# Altium PCB 100885.pcbdoc (part 2 of 3)
Units mm, origin at the board's own origin, x right, y up, seen from the top; angles counter-clockwise.
Board outline 292.21 x 226.73 mm, 2 copper layers (Top Layer, Bottom Layer), stack 0.091 mm thick; 33 components, 69 nets, 230 pads, 87 vias.
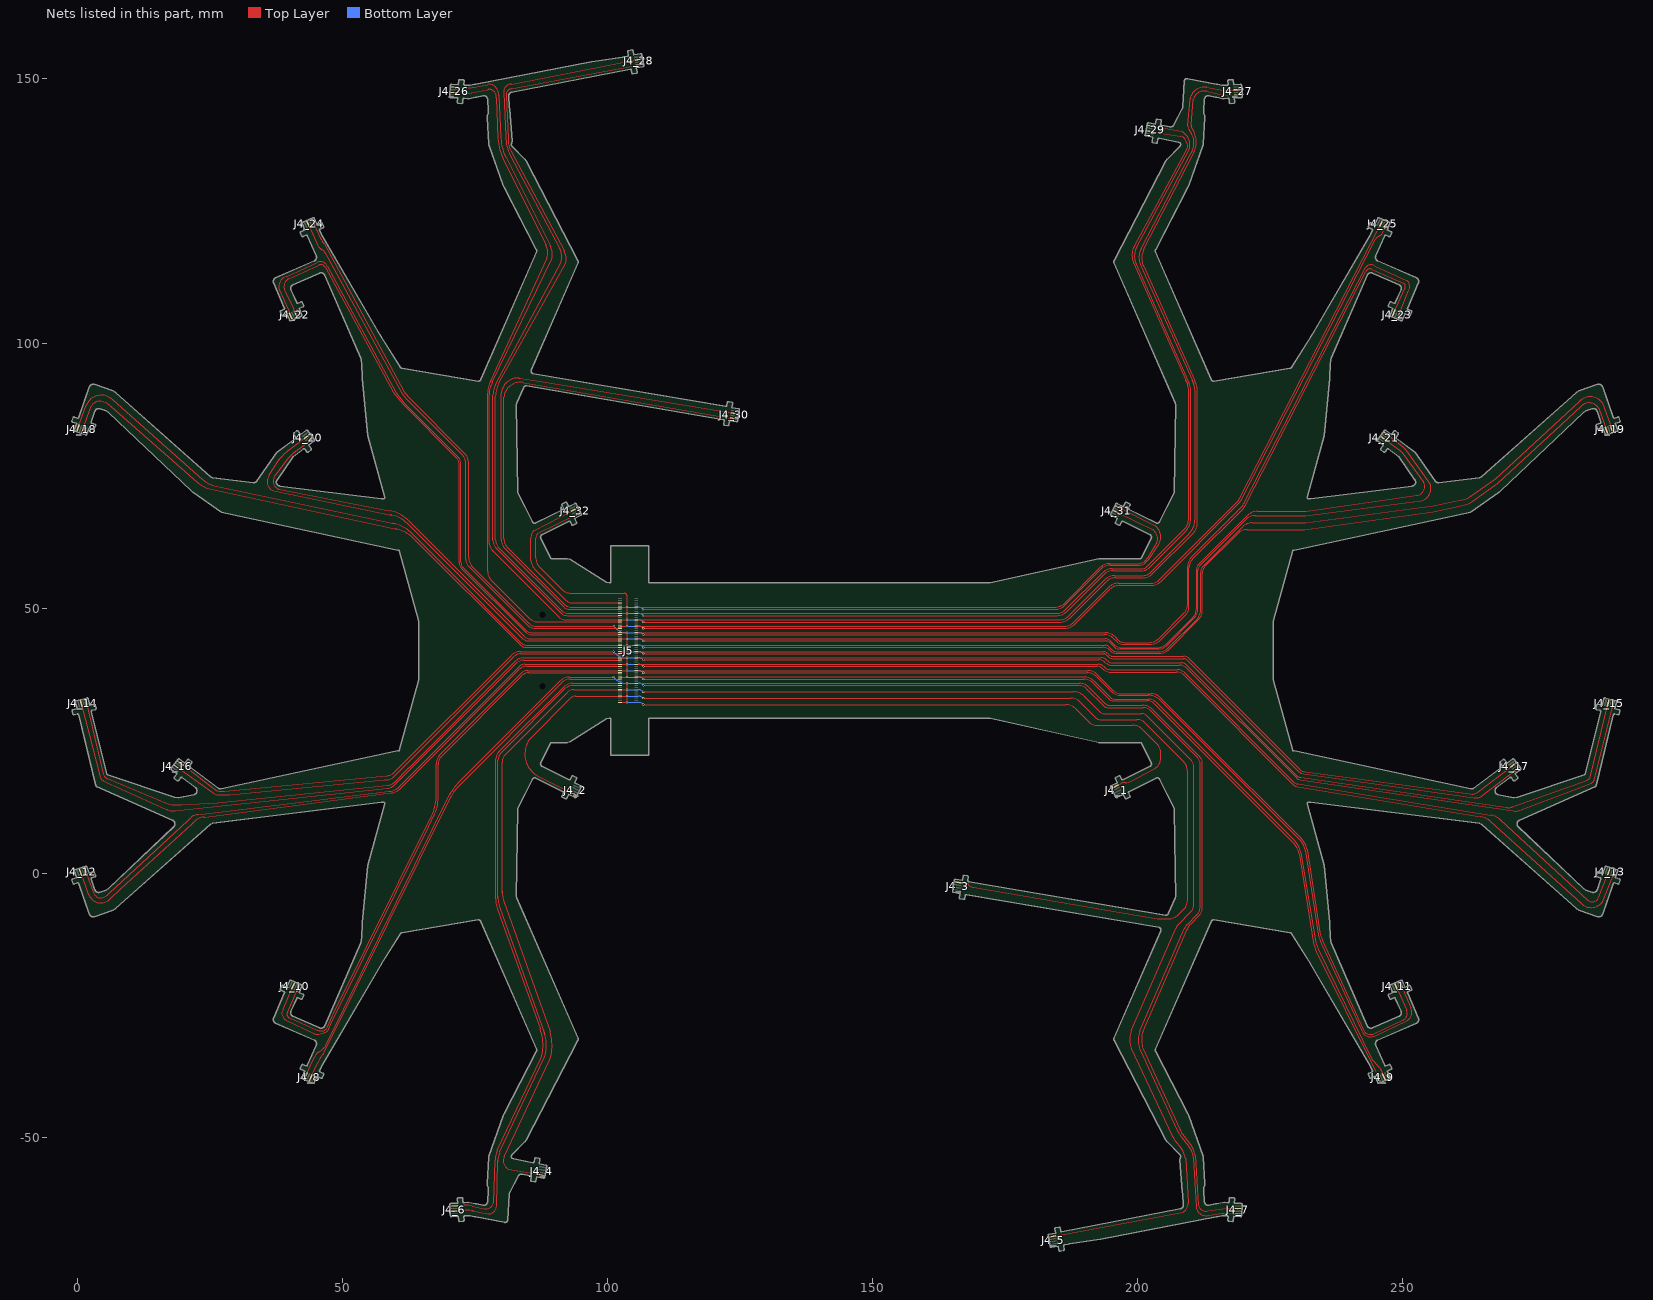
[diagram p2: the nets of this part, all layers, seen from the top]

## Via types
v1: diameter 0.4, hole 0.23, Top Layer to Bottom Layer, tented both sides, 87 vias

## Nets (pads, with @x,y where several pads share a name; then routed paths per layer and width w, separated by ;. In a path a pad name is that pad's centre, name@x,y a point inside that pad or via, vN(x,y) a via of type N, cw(c..) or ccw(c..) an arc to the next point about the centre after c; other vN are vias at no path point) (continued)
SENSOR_E6: J4_6.2 J5.18 | length 127.8
  Top Layer w0.125: J4_6.2@71.054,-63.812 73.14,-63.656 cw(c73.366,-69.703) 74.335,-63.729 ; 74.591,-63.776 ccw(c73.366,-69.703) 74.335,-63.729 ; 79.032,-62.853 cw(c77.462,-62.77) 77.347,-64.338 74.335,-63.729 ; 79.037,-62.853 79.224,-54.424 ; 79.224,-54.474 cw(c83.492,-54.441) 79.224,-54.424 ; 79.29,-4.409 ccw(c85.151,-4.556) 79.29,-4.703 ; 79.637,-52.609 ccw(c83.492,-54.441) 79.633,-52.617 ; 79.643,-6.57 88.159,-30.431 ; 79.645,-6.57 cw(c85.151,-4.556) 79.29,-4.703 ; 87.815,-29.451 cw(c80.789,-32.469) 88.159,-30.431 ; 87.972,-35.091 ccw(c80.789,-32.469) 88.058,-34.842 ; J5.18@102.329,35.411 93.34,35.411 ccw(c93.34,33.519) 92.002,34.856 79.863,22.717 ccw(c81.246,21.334) 79.29,21.334 79.29,-4.703 ; 79.224,-54.424 cw(c83.492,-54.441) 79.227,-54.269 ; 79.224,-54.424 79.227,-54.269 ; 79.228,-54.269 cw(c83.492,-54.441) 79.633,-52.617 ; 79.633,-52.617 88.058,-34.842 ; 88.058,-34.842 ccw(c80.789,-32.469) 88.419,-32.976 ccw(c80.789,-32.469) 88.419,-31.962 ccw(c80.789,-32.469) 88.159,-30.431
SENSOR_E7: J4_7.2 J5.19 | length 210
  Top Layer w0.125: J5.19@105.409,35.813 189.015,35.813 cw(c189.015,33.273) 190.811,35.069 193.84,32.041 ccw(c194.745,32.946) 194.745,31.666 201.015,31.666 cw(c201.015,29.223) 202.742,30.95 211.727,21.966 cw(c210.481,20.72) 212.243,20.72 212.243,-6.624 cw(c210.38,-6.624) 211.697,-7.941 210.115,-9.523 ccw(c213.058,-12.344) 209.363,-10.623 ; 201.071,-33.255 cw(c205.892,-31.487) 201.056,-33.214 ; 207.951,-48.335 201.056,-33.214 ; 207.953,-48.334 ccw(c214.362,-45.386) 208.711,-49.609 210.047,-51.296 ; 209.345,-10.661 cw(c213.058,-12.344) 209.363,-10.623 ; 210.015,-51.256 cw(c206.629,-53.862) 210.857,-53.242 ; 210.863,-53.288 ccw(c206.629,-53.862) 210.857,-53.242 ; 213.213,-63.771 cw(c212.896,-62.351) 211.485,-62.71 210.857,-53.242 ; 213.217,-63.772 216.819,-63.244 217.175,-63.235 J4_7.2@218.937,-63.332 ; 201.056,-33.214 cw(c205.892,-31.487) 201.04,-29.806 209.363,-10.623
SENSOR_E8: J4_8.2 J5.24 | length 100.9
  Top Layer w0.125: J4_8.2@43.955,-38.655 45.312,-35.771 cw(c50.967,-37.889) 46.05,-34.384 46.279,-34.201 ; 46.271,-34.207 ccw(c45.947,-33.785) 46.424,-34.022 46.54,-33.788 70.428,14.459 ; 70.297,14.207 cw(c77.857,10.444) 70.428,14.459 ; J5.24@102.329,36.611 92.9,36.611 ccw(c92.9,34.582) 91.465,36.016 71.69,16.242 ccw(c76.554,11.459) 70.428,14.459
SENSOR_E9: J4_9.2 J5.25 | length 185.2
  Top Layer w0.125: J5.25@105.409,37.013 189.971,37.013 cw(c189.971,34.473) 191.767,36.269 194.745,33.291 ccw(c195.846,34.391) 195.846,32.835 201.99,32.835 cw(c201.99,30.709) 203.494,32.212 229.74,5.966 ; 229.665,6.041 cw(c226.757,3.058) 229.74,5.966 ; 230.839,3.891 ccw(c226.757,3.058) 229.74,5.966 ; 230.843,3.891 233.527,-12.584 ccw(c240.802,-11.245) 234.077,-14.326 ; 234.076,-14.327 244.212,-35.148 245.54,-36.584 cw(c244.562,-37.791) 246.043,-37.325 246.51,-38.433 J4_9.2@246.511,-38.435
SENSOR_E10: J4_10.2 J5.30 | length 114.4
  Top Layer w0.125: 39.317,-27.748 cw(c39.983,-26.434) 38.715,-25.684 J4_10.2@40.673,-21.274 ; 39.349,-27.758 44.49,-30.22 ; 45.433,-30.41 46.44,-30.115 ; 45.433,-30.413 cw(c45.233,-28.989) 44.74,-30.34 ; 47.349,-29.433 cw(c46.269,-28.92) 46.569,-30.078 ; 47.351,-29.434 47.868,-28.347 66.219,8.718 67.399,11.16 ; 67.168,10.672 ccw(c60.534,14.105) 67.399,11.16 ; 67.99,14.566 cw(c60.534,14.105) 67.999,14.38 ; J5.30@102.329,37.811 85.053,37.811 ccw(c85.053,36.201) 83.915,37.339 68.656,22.08 ccw(c70.243,20.494) 67.999,20.494 67.999,14.38 ; 44.49,-30.22 ccw(c45.233,-28.989) 44.74,-30.34 ; 44.49,-30.22 44.74,-30.34 ; 46.44,-30.115 ccw(c46.101,-28.717) 46.569,-30.078 ; 46.44,-30.115 46.569,-30.078 ; 67.399,11.16 ccw(c60.534,14.105) 67.999,13.83 ; 67.999,13.83 ccw(c60.534,14.105) 67.999,14.38 ; 67.999,13.83 67.999,14.38
SENSOR_E11: J4_11.2 J5.31 | length 192.4
  Top Layer w0.125: J5.31@105.409,38.213 190.596,38.213 cw(c190.596,35.673) 192.392,37.469 195.277,34.585 ccw(c197.073,36.381) 197.073,33.841 202.64,33.841 cw(c202.64,31.577) 204.241,33.178 205.17,32.249 211.984,25.434 230.865,6.554 ; 232.039,4.404 ccw(c227.957,3.57) 230.94,6.479 ; 232.041,4.404 234.425,-11.134 ccw(c241.7,-9.795) 234.89,-12.683 ; 234.975,-12.876 cw(c241.7,-9.795) 234.89,-12.683 ; 244.552,-30.307 250.188,-27.688 ; 244.576,-30.314 cw(c243.953,-29.019) 242.634,-29.59 234.89,-12.683 ; J4_11.2@248.833,-21.476 250.788,-25.885 ; 250.228,-27.667 ccw(c249.637,-26.501) 250.789,-25.884 ; 230.865,6.554 cw(c227.957,3.57) 230.94,6.479 ; 230.865,6.554 230.94,6.479
SENSOR_E12: J4_12.2 J5.36 | length 121.8
  Top Layer w0.125: J4_12.2@0.477,0.169 1.184,-1.796 1.899,-3.759 ; 1.962,-3.932 1.904,-3.774 ccw(c4.784,-2.716) 3.751,-5.604 4.326,-5.604 ccw(c4.326,-3.064) 6.123,-4.861 8.074,-2.909 21.58,9.341 22.055,9.815 cw(c23.851,8.019) 22.483,10.16 cw(c23.851,8.019) 23.119,10.452 cw(c23.851,8.019) 23.851,10.559 23.94,10.559 59.09,15.176 ccw(c59.09,17.505) 59.691,15.255 ccw(c59.09,17.505) 60.736,15.858 ; 60.737,15.858 83.32,38.441 cw(c84.695,37.065) 84.695,39.011 J5.36@102.329,39.011 ; 1.899,-3.759 ccw(c4.784,-2.716) 1.904,-3.773 1.899,-3.759
SENSOR_E13: J4_13.2 J5.37 | length 203.1
  Top Layer w0.125: J5.37@105.359,39.419 192.562,39.419 cw(c192.562,37.788) 193.715,38.941 ccw(c195.043,40.269) 195.043,38.391 207.536,38.391 cw(c207.536,36.596) 208.805,37.866 ; 208.805,37.865 229.491,17.179 ; 229.491,17.179 ccw(c230.311,17.999) 229.944,16.899 230.311,16.84 266.696,10.932 cw(c266.248,7.789) 268.446,10.079 284.947,-5.152 ccw(c285.785,-3.942) 287.101,-4.602 ; 287.099,-4.603 J4_13.2@288.991,0.279
SENSOR_E14: J4_14.2 J5.42 | length 124.3
  Top Layer w0.125: J4_14.2@0.651,31.991 4.215,18.116 ccw(c5.728,18.768) 4.693,17.486 ccw(c5.728,18.768) 5.138,17.23 16.89,11.966 ; 16.765,12.016 ccw(c18.161,15.333) 16.89,11.966 ; 18.356,11.739 cw(c18.161,15.333) 18.243,11.735 ; J5.42@102.329,40.211 84.163,40.211 ccw(c84.163,38.351) 82.847,39.666 62.672,19.491 62.659,19.491 59.812,16.644 cw(c58.369,18.088) 58.369,16.047 18.243,11.735 ; 16.89,11.966 ccw(c18.161,15.333) 18.243,11.735
SENSOR_E15: J4_15.2 J5.43 | length 205.5
  Top Layer w0.125: J5.43@105.384,40.619 105.402,40.636 193.115,40.636 cw(c193.115,39.116) 194.19,40.191 ccw(c195.397,41.398) 195.397,39.691 208.289,39.691 cw(c208.289,38.414) 209.192,39.317 ; 209.192,39.317 230.193,18.316 ccw(c230.77,18.894) 230.537,18.111 230.77,18.077 269.64,12.402 ; 270.816,12.528 cw(c270.016,14.447) 270.761,12.506 ; J4_15.2@288.839,32.108 285.427,18.073 cw(c284.47,18.489) 284.89,17.534 270.761,12.506 ; 269.64,12.402 ccw(c270.016,14.447) 269.791,12.38 ; 269.64,12.402 269.791,12.38 ; 269.791,12.38 ccw(c270.016,14.447) 270.664,12.471 ; 270.664,12.471 ccw(c270.016,14.447) 270.761,12.506 ; 270.664,12.471 270.761,12.506
SENSOR_E16: J4_16.2 J5.48 | length 95.1
  Top Layer w0.125: J4_16.2@18.718,19.984 25.357,15.266 ccw(c26.536,16.445) 25.811,14.944 ccw(c26.536,16.445) 26.536,14.778 28.665,14.778 57.89,17.593 58.011,17.593 ccw(c58.011,20.133) 58.594,17.66 ccw(c58.011,20.133) 59.807,18.336 62.161,20.691 62.175,20.691 82.378,40.894 ; 82.379,40.895 cw(c83.626,39.646) 83.626,41.411 J5.48@102.329,41.411
SENSOR_E17: J4_17.2 J5.49 | length 176.8
  Top Layer w0.125: J5.49@105.409,41.813 193.49,41.813 cw(c193.49,40.479) 194.433,41.423 194.615,41.241 ccw(c195.453,42.078) 195.453,40.894 208.735,40.894 cw(c208.735,39.579) 209.665,40.509 230.593,19.581 ; 230.594,19.58 ccw(c231.638,20.626) 231.246,19.201 231.613,19.148 231.638,19.148 262.665,14.963 263.045,14.911 ccw(c263.095,16.718) 264.184,15.275 J4_17.2@270.942,20.383
SENSOR_E18: J4_18.2 J5.54 | length 121.1
  Top Layer w0.125: J4_18.2@0.946,83.684 2.523,88.116 cw(c4.016,87.35) 4.023,89.028 cw(c4.023,85.999) 6.165,88.141 22.569,73.729 ; 22.565,73.732 ccw(c26.275,77.964) 22.569,73.729 ; 25.247,72.425 60.302,64.885 ; 25.248,72.43 cw(c26.275,77.964) 22.569,73.729 ; 59.865,64.979 cw(c58.664,58.334) 60.302,64.885 ; 63.503,63.044 ccw(c58.664,58.334) 60.302,64.885 ; 63.503,63.045 83.565,42.983 ; 83.565,42.983 ccw(c84.464,43.882) 84.464,42.611 J5.54@102.329,42.611
SENSOR_E19: J4_19.2 J5.55 | length 211.1
  Top Layer w0.125: J5.55@105.409,43.013 193.94,43.013 cw(c193.94,42.102) 194.584,42.746 195.065,42.266 ccw(c196.212,43.413) 196.212,41.791 204.125,41.791 ccw(c204.125,44.181) 205.814,42.49 ; 205.814,42.491 211.239,47.916 ; 212.4,57.929 ccw(c213.56,56.771) 211.921,56.771 211.921,49.56 cw(c209.595,49.56) 211.241,47.917 ; 212.401,57.93 219.819,65.349 cw(c221.615,63.552) 221.615,66.092 231.715,66.092 255.815,69.366 261.215,70.425 ; 263.014,71.194 cw(c260.514,74.552) 262.925,71.13 ; 283.392,89.016 cw(c284.332,88.063) 283.455,89.074 ; 287.738,88.749 287.743,88.736 ; J4_19.2@289.481,83.849 287.743,88.736 ; 211.239,47.916 ccw(c209.595,49.56) 211.241,47.917 ; 261.215,70.425 ccw(c260.514,74.552) 261.423,70.465 ; 261.215,70.425 261.423,70.465 ; 261.423,70.465 ccw(c260.514,74.552) 262.9,71.112 ; 262.9,71.112 ccw(c260.514,74.552) 262.925,71.13 ; 262.9,71.112 262.925,71.13 ; 262.925,71.13 267.59,74.391 283.455,89.074 ; 283.455,89.074 cw(c284.332,88.063) 283.534,89.137 cw(c285.464,87.103) 287.743,88.736
SENSOR_E20: J4_20.2 J5.60 | length 89.6
  Top Layer w0.125: 38.045,78.058 cw(c43.831,73.816) 38.054,78.07 ; 39.533,79.575 ccw(c44.629,73.09) 38.054,78.07 ; 39.533,79.576 J4_20.2@43.229,82.389 ; 58.915,67.62 cw(c57.714,60.975) 59.221,67.558 ; 62.553,65.685 ccw(c57.714,60.975) 59.221,67.558 ; 62.556,65.689 83.984,44.261 ; 83.985,44.26 ccw(c85.071,45.347) 85.071,43.811 J5.60@102.329,43.811 ; 38.054,78.07 36.144,75.141 ccw(c37.619,73.912) 36.93,72.121 59.221,67.558
SENSOR_E21: J4_21.2 J5.61 | length 178.1
  Top Layer w0.125: J5.61@105.409,44.213 193.94,44.213 cw(c193.94,42.94) 194.84,43.84 195.49,43.191 ccw(c196.999,44.7) 196.999,42.566 203.741,42.566 ccw(c203.741,45.106) 205.537,43.31 210.402,48.174 ccw(c208.606,49.97) 211.146,49.97 211.146,57.35 cw(c212.334,57.35) 211.493,58.19 ; 211.494,58.191 220.85,67.547 cw(c222.646,65.751) 222.646,68.291 231.84,68.291 252.713,71.28 ; J4_21.2@246.443,82.007 249.464,79.775 250.036,79.214 254.053,73.732 cw(c252.538,72.985) 252.729,71.307
SENSOR_E22: J4_22.2 J5.66 | length 115.4
  Top Layer w0.125: J4_22.2@41.117,105.492 40.619,106.576 39.13,109.723 cw(c40.7,110.625) 39.797,112.195 45.465,114.741 cw(c45.855,113.949) 46.646,114.339 59.481,90.728 61.314,88.559 71.441,78.432 ; 71.442,78.431 cw(c70.177,77.168) 71.964,77.168 71.964,58.541 ccw(c73.351,58.541) 72.37,57.56 84.415,45.516 ccw(c85.635,46.736) 85.635,45.011 J5.66@102.329,45.011
SENSOR_E23: J4_23.2 J5.67 | length 197.2
  Top Layer w0.125: J5.67@105.409,45.411 193.887,45.411 cw(c193.887,42.898) 195.664,44.675 196.273,44.066 ccw(c197.601,45.394) 197.601,43.516 202.203,43.516 ccw(c202.203,46.056) 203.999,44.26 208.835,49.096 ; 208.835,49.096 ccw(c207.374,50.556) 209.44,50.556 209.44,57.853 cw(c211.98,57.853) 210.184,59.649 219.616,69.081 ; 219.573,69.031 ccw(c216.34,71.847) 219.616,69.081 ; 220.125,69.833 cw(c216.34,71.847) 220.064,69.723 ; J4_23.2@249.371,105.467 251.121,109.811 251.19,110.016 ccw(c249.983,110.742) 250.923,111.791 244.71,114.666 ccw(c244.082,113.438) 243.04,114.341 220.064,69.723 ; 219.616,69.081 ccw(c216.34,71.847) 220.064,69.723
SENSOR_E24: J4_24.2 J5.72 | length 108.4
  Top Layer w0.125: J4_24.2@43.476,122.462 44.361,120.541 45.317,118.41 ; 45.303,118.438 ccw(c46.782,119.152) 45.317,118.41 ; 45.831,117.822 cw(c45.236,116.292) 46.081,117.7 ; 46.186,117.621 cw(c46.782,119.152) 45.929,117.748 ; 46.715,117.006 ccw(c45.236,116.292) 46.622,117.172 ; 72.597,78.898 61.906,89.588 61.05,90.788 46.622,117.172 ; 72.597,78.897 cw(c71.142,77.443) 73.199,77.443 73.199,59.2 ccw(c75.033,59.2) 73.736,57.903 84.807,46.833 ccw(c86.308,48.334) 86.308,46.211 J5.72@102.329,46.211 ; 45.317,118.41 ccw(c46.782,119.152) 45.929,117.748 ; 45.929,117.748 46.081,117.7 ; 46.081,117.7 cw(c45.236,116.292) 46.622,117.172
SENSOR_E25: J4_25.2 J5.73 | length 182.1
  Top Layer w0.125: J5.73@105.409,46.611 186.17,46.611 ccw(c186.17,49.151) 187.967,47.355 194.556,53.944 cw(c196.352,52.148) 196.352,54.688 202.398,54.688 ccw(c202.398,57.228) 204.194,55.432 218.77,70.008 ccw(c215.538,72.825) 219.323,70.811 ; 219.284,70.73 245.817,122.256 J4_25.2@246.011,122.674
SENSOR_E26: J4_26.2 J5.78 | length 132.9
  Top Layer w0.125: J4_26.2@71.022,147.34 73.015,147.209 ccw(c73.281,153.072) 74.209,147.276 ; 74.345,147.3 cw(c73.281,153.072) 74.209,147.276 ; 77.95,92.926 ccw(c82.292,90.525) 77.907,92.847 ; 80.219,134.896 88.292,118.641 ; 80.224,134.898 cw(c90.954,139.696) 79.245,138.666 78.972,146.341 78.972,146.452 ccw(c77.333,146.452) 78.961,146.638 ccw(c77.333,146.452) 78.492,147.611 ccw(c77.67,146.716) 77.974,147.892 ccw(c77.67,146.716) 77.538,147.924 ; 88.536,116.075 ccw(c85.367,117.068) 88.387,118.449 ; 88.547,116.07 77.907,92.847 ; J5.78@102.329,47.411 86.836,47.411 cw(c86.836,49.562) 85.315,48.041 77.968,55.387 cw(c79.51,56.929) 77.33,56.929 77.33,90.541 cw(c82.292,90.525) 77.67,92.331 cw(c82.292,90.525) 77.907,92.847 ; 74.209,147.276 77.34,147.885 ; 77.34,147.885 cw(c77.67,146.716) 77.538,147.924 ; 77.34,147.885 77.538,147.924 ; 88.292,118.641 cw(c85.367,117.068) 88.387,118.449 ; 88.292,118.641 88.387,118.449
SENSOR_E27: J4_27.2 J5.79 | length 209.5
  Top Layer w0.125: J5.79@105.334,47.819 185.266,47.819 ccw(c185.266,50.359) 187.062,48.562 193.924,55.425 cw(c195.72,53.629) 195.72,56.169 201.105,56.169 ccw(c201.105,58.056) 202.44,56.721 209.682,63.963 ccw(c206.825,66.82) 210.865,66.82 210.865,91.082 ; 200.609,114.653 210.315,92.993 ; 200.614,114.655 cw(c203.853,116.203) 200.666,117.855 ; 200.671,117.866 ccw(c203.853,116.203) 200.666,117.855 ; 210.868,90.743 ccw(c206.54,90.872) 210.865,91.082 ; J4_27.2@218.908,147.836 216.923,147.696 216.106,147.736 213.037,148.298 ccw(c212.566,145.653) 209.922,146.124 209.493,141.041 ccw(c210.769,141.041) 209.867,140.139 cw(c206.782,137.795) 210.184,135.941 200.666,117.855 ; 210.315,92.993 cw(c206.54,90.872) 210.635,92.278 ; 210.315,92.993 210.635,92.278 ; 210.635,92.278 cw(c206.54,90.872) 210.865,91.082
SENSOR_E28: J4_28.2 J5.84 | length 147.4
  Top Layer w0.125: 78.347,90.228 78.347,62.766 ccw(c80.415,62.766) 78.952,61.304 ; 78.347,90.241 cw(c82.622,90.228) 78.88,92.296 ; 78.88,92.296 91.207,115.274 ; 78.952,61.303 91.102,49.153 ccw(c92.413,50.464) 92.413,48.611 J5.84@102.329,48.611 ; 80.789,138.613 80.776,138.864 ; 80.791,138.569 ccw(c88.812,139.021) 81.624,135.434 ; 81.62,135.431 90.962,117.841 ; 81.853,148.931 ccw(c81.913,147.364) 80.345,147.364 ; 81.852,148.935 J4_28.2@105.835,153.584 ; 91.206,115.275 ccw(c88.036,116.268) 90.977,117.812 ; 80.345,147.341 cw(c81.914,147.364) 80.345,147.364 ; 80.345,147.341 80.345,147.364 ; 80.345,147.341 80.771,138.966 ; 80.771,138.966 ccw(c90.152,139.392) 80.776,138.864 ; 80.771,138.966 80.776,138.864 ; 90.962,117.841 cw(c88.036,116.268) 90.977,117.812 ; 90.962,117.841 90.977,117.812
SENSOR_E29: J4_29.2 J5.85 | length 196.9
  Top Layer w0.125: J5.85@105.359,49.013 184.702,49.013 ccw(c184.702,51.553) 186.498,49.757 193.472,56.732 cw(c195.268,54.936) 195.268,57.476 200.824,57.476 ccw(c200.824,58.906) 201.835,57.895 208.811,64.871 ccw(c206.75,66.932) 209.665,66.932 209.665,91.091 ; 199.3,115.068 cw(c202.539,116.616) 199.19,115.324 ; J4_29.2@202.387,140.028 203.78,139.767 208.197,139.062 cw(c207.506,137.232) 209.337,136.541 199.351,118.266 ccw(c202.539,116.616) 199.19,115.324 ; 209.668,90.753 ccw(c205.34,90.882) 209.665,91.091 ; 199.19,115.324 209.115,93.003 ; 209.115,93.003 cw(c205.34,90.882) 209.443,92.264 ; 209.115,93.003 209.443,92.264 ; 209.443,92.264 cw(c205.34,90.882) 209.665,91.091
SENSOR_E30: J4_30.2 J5.90 | length 102.1
  Top Layer w0.125: 79.904,90.591 cw(c83.052,90.284) 83.209,93.443 ; 79.904,90.591 79.904,63.054 ccw(c82.444,63.054) 80.648,61.258 91.665,50.241 ccw(c92.704,51.279) 92.704,49.811 J5.90@102.329,49.811 ; 83.225,93.442 83.536,93.425 87.159,92.854 J4_30.2@123.976,86.762 ; 83.261,93.44 ccw(c83.052,90.284) 83.209,93.443 ; 83.262,93.44 83.209,93.443
SENSOR_E31: J4_31.2 J5.91 | length 113.9
  Top Layer w0.125: J5.91@105.409,50.211 184.436,50.211 ccw(c184.436,52.751) 186.232,50.955 192.96,57.682 cw(c194.756,55.886) 194.756,58.426 200.24,58.426 ccw(c200.24,59.969) 201.331,58.878 202.029,59.577 ; J4_31.2@196.009,68.164 202.936,64.764 cw(c201.816,63.117) 203.462,61.997 202.025,59.581
SENSOR_E32: J4_32.2 J5.96 | length 34.9
  Top Layer w0.125: J4_32.2@93.732,68.598 93.73,68.597 86.076,64.646 ccw(c87.491,63.231) 85.49,63.231 85.49,59.091 ccw(c87.844,59.091) 86.179,57.426 92.095,51.511 ccw(c93.303,52.72) 93.303,51.011 J5.96@102.329,51.011
SENSOR_VCC1: J4_1.4 J4_2.4 J4_3.4 J4_4.4 J4_5.4 J4_6.4 J4_7.4 J4_8.4 J5.2 J5.8 J5.14 J5.20 | length 1127.7
  Top Layer w0.125: J4_8.4@43.039,-38.247 44.715,-34.666 cw(c46.728,-35.522) 45.372,-33.806 45.511,-33.692 46.083,-33.32 ccw(c44.91,-31.597) 46.759,-32.561 70.321,15.03 ccw(c77.807,11.121) 70.247,14.884 ; 70.321,15.03 cw(c77.807,11.121) 71.69,16.943 91.014,36.267 cw(c92.81,34.471) 92.81,37.011 v1(101.115,37.011) ; J4_6.4@70.986,-62.832 72.939,-62.72 cw(c73.166,-68.768) 74.39,-62.841 76.666,-63.316 ; 80.09,-3.384 ccw(c85.951,-3.531) 80.09,-3.678 ; 80.445,-5.545 cw(c85.951,-3.531) 80.374,-5.339 ; 81.366,-55.875 cw(c81.907,-54.334) 80.456,-53.584 89.075,-35.268 ccw(c80.203,-32.475) 89.149,-29.929 80.374,-5.339 ; 81.367,-55.875 83.624,-56.259 J4_4.4@87.384,-56.981 ; 81.37,-55.876 ccw(c81.603,-54.494) 81.381,-55.878 ; 92.939,32.965 85.359,25.385 ccw(c89.097,22.477) 87.042,18.21 J4_2.4@93.508,14.969 ; 92.94,32.966 cw(c94.015,31.889) 94.015,33.411 J5.8@102.329,33.411 v1(103.665,33.411) ; J5.2@102.329,32.211 v1(103.665,32.211) v1(103.665,33.411) ; v1(106.715,31.816) 186.451,31.816 cw(c186.451,29.276) 188.247,31.072 190.698,28.621 ccw(c192.494,30.417) 192.494,27.877 199.11,27.877 cw(c199.11,25.337) 200.906,27.133 203.648,24.391 cw(c201.852,22.595) 204.392,22.595 204.392,21.583 cw(c202.178,21.687) 203.159,19.699 198.715,17.316 cw(c197.624,19.319) 197.74,17.041 ccw(c197.579,15.57) 196.796,16.825 J4_1.4@195.775,16.313 ; v1(106.715,33.016) 187.388,33.016 cw(c187.388,30.476) 189.184,32.272 192.065,29.391 ccw(c193.091,30.417) 193.091,28.966 199.826,28.966 cw(c199.826,26.687) 201.438,28.298 208.701,21.035 cw(c206.905,19.239) 209.445,19.239 209.445,-5.134 cw(c207.05,-5.134) 208.744,-6.827 ; v1(106.715,34.216) 188.013,34.216 cw(c188.013,31.676) 189.809,33.472 192.84,30.441 ccw(c193.685,31.286) 193.685,30.091 200.726,30.091 cw(c200.726,28.602) 201.779,29.655 210.066,21.367 cw(c208.669,19.97) 210.645,19.97 210.645,-5.776 cw(c208.332,-5.776) 209.968,-7.411 207.865,-9.514 ccw(c210.808,-12.335) 207.175,-10.486 198.815,-29.738 ccw(c203.667,-31.42) 198.846,-33.188 ; v1(106.781,35.416) 188.915,35.416 cw(c188.915,33.364) 190.366,34.815 193.64,31.541 ccw(c194.341,32.241) 194.341,31.251 201.065,31.251 cw(c201.065,29.283) 202.456,30.674 211.29,21.841 cw(c209.949,20.5) 211.845,20.5 211.845,-6.361 cw(c209.745,-6.361) 211.231,-7.845 ; J4_3.4@166.151,-1.758 167.694,-2.013 cw(c167.694,-2.481) 168.024,-2.15 168.164,-2.29 ccw(c169.06,-1.393) 169.06,-2.661 203.758,-8.635 205.884,-8.635 ccw(c205.884,-6.095) 206.993,-8.38 ccw(c205.884,-6.095) 207.68,-7.891 208.744,-6.828 ; J4_5.4@183.935,-68.585 184.666,-68.445 208.514,-64.004 ccw(c207.737,-62.322) 209.585,-62.184 209.086,-53.949 ; 198.838,-33.191 206.476,-49.448 ccw(c212.716,-46.157) 207.065,-50.38 208.234,-51.918 208.249,-51.938 ; 200.446,-33.272 cw(c205.267,-31.504) 200.439,-33.253 ; 207.482,-48.507 ccw(c213.891,-45.559) 207.546,-48.642 ; 208.234,-51.918 cw(c204.848,-54.524) 208.249,-51.938 ; 209.082,-53.949 ccw(c204.848,-54.524) 208.249,-51.938 ; 209.69,-51.566 cw(c206.319,-54.191) 209.704,-51.584 ; 210.553,-53.616 ccw(c206.319,-54.191) 209.704,-51.584 ; 210.554,-53.616 211.065,-63.079 ccw(c212.958,-62.744) 213.427,-64.609 215.951,-64.207 216.757,-64.178 J4_7.4@218.877,-64.319 ; 211.23,-7.846 209.542,-9.534 ccw(c212.485,-12.355) 208.837,-10.535 200.415,-29.823 ccw(c205.267,-31.504) 200.439,-33.253 ; 76.666,-63.316 ccw(c77.01,-61.826) 76.674,-63.317 ; 76.666,-63.316 76.674,-63.317 ; 76.674,-63.317 ccw(c77.01,-61.826) 78.491,-62.209 78.773,-54.184 cw(c83.041,-54.151) 79.186,-52.319 87.38,-35.031 ccw(c79.531,-32.427) 87.223,-29.391 79.245,-7.034 cw(c84.751,-5.021) 78.89,-4.874 78.89,21.497 cw(c80.853,21.497) 79.464,22.884 91.755,35.175 cw(c93.29,33.639) 93.29,35.811 J5.20@102.329,35.811 103.632,35.811 v1(103.665,35.844) v1(103.665,34.611) ; 80.09,-3.678 ccw(c85.951,-3.531) 80.374,-5.339 ; 80.09,-3.678 80.09,20.933 cw(c82.215,20.933) 80.712,22.435 92.356,34.079 cw(c93.64,32.794) 93.64,34.611 J5.14@102.329,34.611 v1(103.665,34.611) ; v1(103.665,33.411) v1(103.665,34.611) ; 200.439,-33.253 207.546,-48.642 ; 207.546,-48.642 ccw(c213.891,-45.559) 208.24,-49.782 209.704,-51.584
  Bottom Layer w0.125: v1(101.115,37.011) 101.538,36.587 ccw(c103.334,38.384) 103.334,35.844 v1(103.665,35.844) 105.748,35.844 cw(c105.748,34.383) v1(106.781,35.416) ; v1(103.665,32.211) 105.762,32.211 cw(c105.762,30.863) v1(106.715,31.816) ; v1(103.665,33.411) 105.762,33.411 cw(c105.762,32.063) v1(106.715,33.016) ; v1(103.665,34.611) 105.762,34.611 cw(c105.762,33.263) v1(106.715,34.216)
SENSOR_VCC2: J4_9.4 J4_10.4 J4_11.4 J4_12.4 J4_13.4 J4_14.4 J4_15.4 J4_16.4 J5.26 J5.32 J5.38 J5.44 | length 1255.7
  Top Layer w0.125: J4_12.4@1.415,0.501 2.063,-1.33 2.89,-3.654 ccw(c4.317,-3.182) 4.24,-4.683 ccw(c4.24,-2.887) 5.51,-4.157 5.899,-3.767 20.796,9.941 21.278,10.423 cw(c22.64,9.061) 21.605,10.685 cw(c22.64,9.061) 22.174,10.93 cw(c22.64,9.061) 22.64,10.987 58.693,15.412 ccw(c58.693,17.868) 60.43,16.131 62.99,18.691 63.004,18.691 83.306,38.993 ; J4_14.4@1.607,32.246 J4_14.4@1.611,32.23 4.765,18.666 ccw(c6.278,19.318) 5.243,18.036 ccw(c6.278,19.318) 5.688,17.78 16.75,13.166 ccw(c18.165,16.475) 18.359,12.881 19.54,12.935 26.29,13.241 58.44,16.615 ccw(c58.44,18.491) 59.767,17.165 62.493,19.891 62.507,19.891 82.669,40.053 ; J4_16.4@19.318,20.781 20.158,20.146 ; 20.158,20.146 25.59,16.021 ccw(c27.085,17.516) 26.046,15.674 ccw(c27.085,17.516) 27.085,15.402 27.59,15.402 58.338,18.4 ccw(c58.338,20.204) 58.687,18.434 ccw(c58.338,20.204) 59.615,18.928 81.753,41.067 cw(c83.549,39.271) 83.549,41.811 v1(101.065,41.811) ; 39.954,-27.322 cw(c40.171,-26.632) 39.571,-26.228 J4_10.4@41.586,-21.68 ; 39.962,-27.336 45.18,-29.634 ccw(c45.907,-28.015) 46.382,-29.725 ccw(c45.693,-28.151) 47.192,-28.991 ; 47.19,-28.993 48.048,-27.063 48.236,-26.639 66.778,10.81 ccw(c60.143,14.243) 67.599,14.703 67.599,20.537 cw(c70.139,20.537) 68.343,22.333 83.73,37.72 ; 82.67,40.054 cw(c84.015,38.707) 84.015,40.611 J5.44@102.329,40.611 103.632,40.611 v1(103.665,40.644) v1(103.665,39.416) ; 83.306,38.993 cw(c84.314,37.986) 83.309,38.996 cw(c84.314,37.986) 83.323,39.01 cw(c84.314,37.986) 84.314,39.411 J5.38@102.329,39.411 103.675,39.411 v1@103.675,38.211 ; 83.73,37.72 cw(c84.915,36.535) 84.915,38.211 J5.32@102.329,38.211 v1(103.665,38.211) v1@103.675,38.211 ; J5.26@102.329,37.011 v1(103.665,37.011) 103.675,37.011 v1@103.675,38.211 ; v1(106.715,36.616) 189.838,36.616 cw(c189.838,34.076) 191.634,35.872 194.665,32.841 ccw(c195.389,33.565) 195.389,32.541 201.815,32.541 cw(c201.815,30.669) 203.139,31.992 229.34,5.791 cw(c226.432,2.808) 230.514,3.641 233.206,-13.084 ccw(c240.48,-11.745) 233.756,-14.826 244.78,-37.094 245.617,-38.818 J4_9.4@245.622,-38.827 ; v1(106.715,37.816) 190.494,37.816 cw(c190.494,35.276) 192.291,37.072 195.108,34.254 ccw(c196.77,35.916) 196.179,33.641 ccw(c196.77,35.916) 196.77,33.566 202.021,33.566 cw(c202.021,30.372) 204.279,32.63 230.519,6.391 ; v1(106.748,39.011) 192.341,39.011 cw(c192.341,37.492) 193.415,38.566 193.419,38.561 ccw(c194.917,40.059) 194.917,37.941 207.351,37.941 cw(c207.351,35.892) 208.8,37.341 229.537,16.604 ccw(c230.286,17.353) 229.949,16.348 ccw(c230.552,18.98) 230.286,16.293 264.815,10.655 cw(c264.051,6.747) 266.574,9.827 ; v1(106.748,40.249) 192.664,40.249 cw(c192.664,38.515) 193.89,39.741 ccw(c195.097,40.948) 195.097,39.241 207.921,39.241 cw(c207.921,37.311) 209.286,38.675 230.011,17.95 ccw(c230.757,18.695) 230.454,17.685 230.757,17.641 270.957,11.74 ccw(c271.332,13.785) 272.133,11.866 285.616,16.932 ; 234.697,-13.401 cw(c241.421,-10.32) 234.655,-13.309 ; 244.667,-30.75 cw(c243.953,-29.21) 242.34,-29.738 234.655,-13.309 ; 244.684,-30.759 250.795,-27.875 ; J4_9.4@245.581,-38.829 J4_9.4@245.583,-38.835 ; J4_11.4@249.73,-21.076 251.58,-25.459 ; 250.808,-27.867 ccw(c250.05,-26.295) 251.582,-25.46 ; 266.609,9.803 283.755,-5.734 ccw(c285.61,-3.864) 287.919,-5.134 J4_13.4@289.953,-0.005 ; 285.612,16.94 ccw(c285.192,17.895) 286.183,17.566 289.515,30.724 J4_15.4@289.802,31.868 ; 230.519,6.391 cw(c227.611,3.408) 230.594,6.316 ; 230.519,6.391 230.594,6.316 ; 230.594,6.316 cw(c227.611,3.408) 231.667,4.357 234.147,-11.659 ccw(c241.421,-10.32) 234.655,-13.309
  Bottom Layer w0.125: v1(101.065,41.811) 101.488,41.387 ccw(c103.284,43.184) 103.284,40.644 v1(103.665,40.644) 105.795,40.644 cw(c105.795,39.296) v1(106.748,40.249) ; v1(103.665,37.011) 105.762,37.011 cw(c105.762,35.663) v1(106.715,36.616) ; v1(103.665,38.211) 105.762,38.211 cw(c105.762,36.863) v1(106.715,37.816) ; v1(103.665,39.416) 105.77,39.416 cw(c105.77,38.032) v1(106.748,39.011)
SENSOR_VCC3: J4_17.4 J4_18.4 J4_19.4 J4_20.4 J4_21.4 J4_22.4 J4_23.4 J4_24.4 J5.50 J5.56 J5.62 J5.68 | length 1214.9
  Top Layer w0.125: J4_18.4@0.015,84.023 0.456,85.226 1.604,88.293 cw(c4.424,87.165) 6.564,89.321 23.481,74.34 ccw(c27.19,78.572) 25.743,73.134 59.415,66.003 ; 37.252,75.12 37.348,75.216 ccw(c38.556,74.03) 38.04,72.418 58.789,68.407 cw(c57.588,61.762) 62.426,66.472 ; 37.349,75.217 39.686,78.279 ; 39.395,77.908 cw(c45.181,73.666) 39.686,78.279 ; J4_22.4@40.213,105.09 40.211,105.096 39.66,106.332 37.965,110.116 cw(c39.847,110.673) 39.29,112.554 45.244,115.291 cw(c45.777,114.02) 47.048,114.552 59.976,90.753 61.725,88.573 71.776,78.522 ; 40.885,79.422 42.819,80.855 42.821,80.857 J4_20.4@43.823,81.6 ; 40.89,79.416 ccw(c45.181,73.666) 39.686,78.279 ; J4_24.4@44.395,122.872 44.901,121.76 ; 44.901,121.76 45.79,119.831 ccw(c48.534,121.133) 46.167,119.23 cw(c44.097,117.378) 46.503,118.766 ; 46.503,118.766 61.535,90.985 62.364,89.874 73.065,79.172 cw(c71.445,77.553) 73.066,79.171 cw(c71.445,77.553) 73.736,77.553 73.736,59.572 ccw(c76.276,59.572) 74.48,57.776 85.09,47.166 ccw(c86.452,48.559) 86.44,46.611 v1(101.19,46.611) ; 62.427,66.474 84.14,44.761 ccw(c85.469,46.09) 85.469,44.211 J5.62@102.329,44.211 v1(103.665,44.211) 103.675,44.211 103.675,41.811 v1(103.665,41.811) J5.50@102.329,41.811 ; 63.053,64.068 ccw(c58.214,59.358) 62.791,64.322 ; 71.776,78.521 cw(c70.595,77.341) 72.265,77.341 72.265,58.791 ccw(c73.955,58.791) 72.759,57.597 ; 72.76,57.596 84.49,45.866 ccw(c85.589,46.965) 85.589,45.411 J5.68@102.329,45.411 v1(103.665,45.411) 103.69,45.411 v1@103.69,44.211 ; 83.623,43.491 69.999,57.115 62.791,64.322 ; 83.623,43.49 ccw(c84.782,44.65) 84.782,43.011 J5.56@102.329,43.011 v1(103.665,43.011) ; v1(106.701,45.016) 193.698,45.016 cw(c193.698,42.476) 195.494,44.272 196.05,43.716 ccw(c197.26,44.926) 197.26,43.215 202.462,43.215 ccw(c202.462,45.755) 204.258,43.959 209.27,48.971 ccw(c208.192,50.05) 209.717,50.05 209.717,57.607 cw(c212.099,57.607) 210.415,59.291 219.918,68.794 ccw(c216.645,71.563) 220.43,69.549 ; v1(106.715,41.416) 193.665,41.416 cw(c193.665,40.772) 194.12,41.227 194.432,40.916 ccw(c195.498,41.982) 195.498,40.474 208.603,40.474 cw(c208.603,39.185) 209.515,40.097 230.458,19.153 ; v1(106.715,42.616) 193.415,42.616 cw(c193.415,40.745) 194.738,42.068 ccw(c196.057,43.387) 196.057,41.522 204.19,41.522 ccw(c204.19,44.023) 205.958,42.253 ; v1(106.715,43.816) 193.94,43.816 cw(c193.94,42.539) 194.842,43.442 195.754,42.53 ccw(c196.272,43.048) 196.272,42.316 203.915,42.316 ccw(c203.915,44.687) 205.591,43.01 210.652,48.07 ccw(c208.856,49.867) 211.396,49.867 211.396,57.186 cw(c212.573,57.186) 211.741,58.018 220.444,66.722 cw(c222.24,64.926) 222.24,67.466 231.765,67.466 252.024,70.065 252.069,70.071 ; 205.959,42.254 211.59,47.885 ccw(c210.141,49.334) 212.19,49.334 212.19,56.591 cw(c214.061,56.591) 212.738,57.914 218.921,64.097 cw(c220.717,62.301) 220.717,64.841 231.515,64.841 255.84,68.216 261.465,69.421 ccw(c260.764,73.549) 263.264,70.191 268.015,73.566 283.748,88.122 cw(c285.249,86.659) 286.87,87.988 cw(c285.745,87.191) 287.023,87.709 J4_19.4@288.531,83.522 ; 220.427,69.53 243.09,113.541 cw(c243.883,113.166) 244.219,113.977 250.24,111.316 250.242,111.315 cw(c249.815,110.691) 250.441,110.267 250.44,110.266 J4_23.4@248.377,105.7 ; 230.459,19.153 ccw(c231.365,20.06) 231.01,18.828 231.365,18.778 263.44,14.255 263.833,14.212 ccw(c264.034,15.393) 264.749,14.431 J4_17.4@271.543,19.585 ; J4_21.4@247.04,82.798 250.111,80.477 250.59,79.949 255.285,73.397 cw(c252.919,72.68) 253.25,70.23 ; 252.102,70.075 253.25,70.231 ; 59.415,66.003 cw(c58.214,59.358) 59.81,65.919 ; 59.415,66.003 59.81,65.919 ; 59.81,65.919 cw(c58.214,59.358) 62.791,64.322
  Bottom Layer w0.125: v1(101.19,46.611) 101.646,46.155 ccw(c103.442,47.951) 103.342,45.413 ccw(c103.442,47.951) 103.442,45.411 v1(103.665,45.411) 105.748,45.411 cw(c105.748,44.063) v1(106.701,45.016) ; v1(103.665,41.811) 105.762,41.811 cw(c105.762,40.463) v1(106.715,41.416) ; v1(103.665,43.011) 105.762,43.011 cw(c105.762,41.663) v1(106.715,42.616) ; v1(103.665,44.211) 105.762,44.211 cw(c105.762,42.863) v1(106.715,43.816)
SENSOR_VCC4: J4_25.4 J4_26.4 J4_27.4 J4_28.4 J4_29.4 J4_30.4 J4_31.4 J4_32.4 J5.74 J5.80 J5.86 J5.92 | length 1132.6
  Top Layer w0.125: J4_26.4@71.084,148.358 73.568,148.242 73.912,148.242 ccw(c73.74,154.109) 74.804,148.337 ; 74.786,148.329 77.401,148.841 cw(c77.732,147.671) 78.553,148.566 78.843,148.341 cw(c77.404,146.901) 79.427,147.127 cw(c77.404,146.901) 79.44,146.901 79.44,146.861 79.82,138.84 ; 78.287,60.801 cw(c79.939,62.453) 78.185,60.91 ; 79.451,92.422 ccw(c83.912,89.956) 78.815,89.972 78.815,62.897 ccw(c80.943,62.897) 79.438,61.393 91.165,49.666 ; 79.456,92.449 92.015,114.9 ; 79.822,138.804 cw(c89.201,139.267) 79.822,138.809 ; 79.825,138.791 ccw(c89.17,139.252) 80.731,135.212 ; 80.799,135.073 cw(c89.201,139.267) 80.731,135.211 ; 81.656,136.354 91.771,117.464 ; 81.657,136.371 cw(c86.227,138.482) 81.193,138.466 80.811,146.941 cw(c81.952,146.878) 81.79,148.009 ; 81.79,148.013 J4_28.4@106.026,152.602 ; 86.815,64.099 ccw(c87.698,63.216) 86.449,63.216 86.449,59.509 ccw(c88.989,59.509) 87.193,57.713 91.323,53.582 ccw(c93.119,55.379) 93.119,52.839 103.102,52.839 cw(c103.102,52.276) 103.665,52.276 v1@103.665,50.251 ; 86.842,64.117 93.791,67.514 J4_32.4@94.177,67.71 J4_32.4@94.184,67.712 ; 90.709,48.385 ccw(c92.095,49.772) 90.738,48.357 ; 91.165,49.665 ccw(c92.747,51.248) 92.747,49.011 J5.86@102.329,49.011 v1(103.665,49.011) ; 91.77,117.466 cw(c88.845,115.893) 91.771,117.464 ; 92.014,114.9 ccw(c88.845,115.893) 91.774,117.459 ; 92.067,47.811 J5.80@102.329,47.811 v1(103.665,47.811) ; 92.095,47.811 cw(c92.095,49.772) 90.738,48.357 ; J5.74@102.329,46.611 v1(103.665,46.611) v1(103.665,47.811) ; v1@103.647,50.233 ccw(c102.901,50.98) v1@103.665,50.251 ; v1(106.665,48.611) 184.868,48.611 ccw(c184.868,51.151) 186.664,49.355 193.639,56.329 cw(c195.435,54.533) 195.435,57.073 200.865,57.073 ccw(c200.865,58.807) 202.09,57.58 ; v1(106.665,49.766) 184.438,49.766 ccw(c184.438,52.306) 186.234,50.51 193.091,57.367 cw(c194.887,55.571) 194.887,58.111 200.224,58.111 ccw(c200.224,60.006) 201.565,58.666 202.252,59.353 203.84,61.746 ccw(c201.682,63.399) 203.335,65.556 196.451,69.049 J4_31.4@196.4,69.075 ; v1(106.715,46.216) 186.338,46.216 ccw(c186.338,48.756) 188.134,46.96 194.721,53.547 cw(c196.517,51.751) 196.517,54.291 202.563,54.291 ccw(c202.563,56.831) 204.359,55.035 219.111,69.787 ccw(c215.878,72.603) 219.663,70.589 ; v1(106.715,47.391) 185.443,47.391 ccw(c185.443,49.931) 187.239,48.135 194.102,54.997 cw(c195.898,53.201) 195.898,55.741 201.012,55.741 ccw(c201.012,58.281) 202.808,56.485 210.575,64.252 ccw(c208.779,66.048) 211.319,66.048 211.319,90.761 ; J4_30.4@123.804,85.784 87.022,92.097 84.139,92.59 ; 199.768,114.893 cw(c203.007,116.441) 199.678,115.099 ; 202.091,57.581 209.076,64.567 ccw(c206.75,66.893) 209.078,64.568 ccw(c206.75,66.893) 210.04,66.893 210.04,91.054 ; J4_29.4@202.579,141.018 208.34,139.983 cw(c207.176,137.518) 209.64,136.354 199.819,118.091 ccw(c203.007,116.441) 199.678,115.099 ; 210.043,90.716 ccw(c205.715,90.845) 210.04,91.054 ; 211.318,90.716 ccw(c206.99,90.845) 211.319,90.761 ; J4_27.4@218.968,146.859 217.087,146.764 216.261,146.82 213.039,147.537 ccw(c212.552,145.553) 210.568,146.04 210.103,141.141 ccw(c211.083,141.141) 210.31,140.537 cw(c206.483,137.969) 210.49,135.691 201.191,117.741 ccw(c204.379,116.091) 201.14,114.543 210.804,92.894 cw(c206.99,90.845) 211.062,92.316 cw(c206.99,90.845) 211.319,90.929 ; 219.647,70.554 244.876,119.548 cw(c246.138,118.886) 245.767,120.263 ccw(c245.108,121.319) 246.265,120.859 J4_25.4@246.941,122.259 ; 78.185,60.91 cw(c79.939,62.453) 77.61,62.274 77.61,90.241 cw(c82.572,90.225) 77.988,92.127 cw(c82.572,90.225) 78.229,92.626 89.439,115.884 ccw(c86.244,116.793) 89.255,118.195 ; 78.185,60.91 90.738,48.357 ; 79.82,138.84 ccw(c89.201,139.267) 79.822,138.809 ; 79.82,138.84 79.822,138.809 ; 80.731,135.211 89.17,118.366 ; 84.132,92.591 cw(c83.538,89.484) 84.139,92.59 ; 84.132,92.591 ccw(c83.538,89.484) 80.39,89.791 80.39,63.168 ccw(c82.93,63.168) 81.134,61.372 91.698,50.808 ccw(c93.14,52.25) 93.14,50.211 J5.92@102.329,50.211 102.335,50.216 v1(103.665,50.216) ; 84.132,92.591 84.139,92.59 ; 89.17,118.366 cw(c86.244,116.793) 89.255,118.195 ; 89.17,118.366 89.255,118.195 ; 91.771,117.464 cw(c88.845,115.893) 91.774,117.459 ; 91.771,117.464 91.774,117.459 ; v1(103.665,47.811) v1(103.665,49.011) ; v1(103.665,49.011) v1(103.665,50.216) ; v1(103.665,50.216) v1@103.665,50.251 ; 199.678,115.099 209.599,92.76 ; 209.599,92.76 cw(c205.715,90.845) 209.74,92.442 ; 209.599,92.76 209.74,92.442 ; 209.74,92.442 cw(c205.715,90.845) 210.04,91.054 ; 211.319,90.761 ccw(c206.99,90.845) 211.319,90.929 ; 211.319,90.761 211.319,90.929
  Bottom Layer w0.125: v1(103.665,46.611) 105.762,46.611 cw(c105.762,45.263) v1(106.715,46.216) ; v1(103.665,47.811) 105.701,47.811 cw(c105.701,46.377) v1(106.715,47.391) ; v1(103.665,49.011) 105.699,49.011 cw(c105.699,47.645) v1(106.665,48.611) ; v1(103.665,50.216) 105.579,50.216 cw(c105.579,48.679) v1(106.665,49.766)

## Polygon pours and split planes (outlines as drawn)
no net on FAB_DWG (solid): 82 vertices, not listed, extent 420.719,-128.99 427.065,-125.762
no net on FAB_DWG (solid): 83 vertices, not listed, extent 409.107,-130.346 414.012,-125.758
no net on FAB_DWG (solid): 74 vertices, not listed, extent 395.325,-131.581 402.718,-124.845
no net on FAB_DWG (solid): 89 vertices, not listed, extent 383.655,-128.609 390.075,-124.845
no net on FAB_DWG (solid): 1029 vertices, not listed, extent 343.436,-138.417 484.482,-124.843
no net on FAB_DWG (solid): -174.272,83.129 -174.772,81.629 -205.772,81.629 -206.272,83.129 -174.272,83.129
no net on FAB_DWG (solid): -173.882,95.119 -174.382,93.619 -205.582,93.619 -206.082,95.119 -173.882,95.119
no net on FAB_DWG (solid): -206.051,102.117 -205.551,103.617 -174.351,103.617 -173.851,102.117 -206.051,102.117
no net on FAB_DWG (solid): -205.811,114.307 -205.311,115.807 -174.311,115.807 -173.811,114.307 -205.811,114.307
no net on FAB_DWG "FAB_DWG-No Net" (solid): -208.292,-13.506 -207.792,-12.006 -176.792,-12.006 -176.292,-13.506 -208.292,-13.506
no net on FAB_DWG "FAB_DWG-No Net" (solid): -208.532,-25.696 -208.032,-24.196 -176.832,-24.196 -176.332,-25.696 -208.532,-25.696
no net on FAB_DWG (solid): -176.364,-32.694 -176.864,-34.194 -208.064,-34.194 -208.564,-32.694 -176.364,-32.694
no net on FAB_DWG (solid): -176.754,-44.684 -177.254,-46.184 -208.254,-46.184 -208.754,-44.684 -176.754,-44.684
no net on FAB_DWG "FR4 STIFFENER AT J5, BOT" (solid): -208.812,-49.641 -170.425,-49.641 -170.425,-51.701 -215.325,-51.701 -215.325,-49.641 -208.763,-49.641
no net on FAB_DWG "FR4 STIFFENER AT J5, BOT" (solid): -62,-140.581 -29.724,-140.581 -29.724,-142.642 -62.011,-142.642 -62.011,-142.576 -62.011,-140.582 -61.952,-140.582
no net on FAB_DWG (solid): -29.942,-135.624 -30.442,-137.124 -61.442,-137.124 -61.942,-135.624 -29.942,-135.624
no net on FAB_DWG (solid): -29.552,-123.634 -30.052,-125.134 -61.252,-125.134 -61.752,-123.634 -29.552,-123.634
no net on FAB_DWG "FAB_DWG-No Net" (solid): -61.721,-116.636 -61.221,-115.136 -30.021,-115.136 -29.521,-116.636 -61.721,-116.636
no net on FAB_DWG "FAB_DWG-No Net" (solid): -61.481,-104.446 -60.981,-102.946 -29.981,-102.946 -29.481,-104.446 -61.481,-104.446
no net on FAB_DWG "FR4 STIFFENER AT J5, BOT" (solid): -198.1,-141.704 -165.824,-141.704 -165.824,-143.764 -198.11,-143.764 -198.11,-143.698 -198.11,-141.705 -198.052,-141.705
no net on FAB_DWG (solid): -166.042,-132.972 -166.542,-134.472 -197.542,-134.472 -198.042,-132.972 -166.042,-132.972
no net on FAB_DWG (solid): -165.902,-123.632 -166.402,-125.132 -197.602,-125.132 -198.102,-123.632 -165.902,-123.632
no net on FAB_DWG "FAB_DWG-No Net" (solid): -198.071,-116.634 -197.571,-115.134 -166.371,-115.134 -165.871,-116.634 -198.071,-116.634
no net on FAB_DWG "NONET_L-01_P-001" (solid): 402.795,-3.423 398.875,-3.423 398.875,18.234 402.795,18.234
no net on FAB_DWG "NONET_L-01_P-001" (solid): 412.941,192.274 412.941,188.062 397.826,180.505 397.826,199.831 412.941,192.274
no net on FAB_DWG "NONET_L-01_P-001" (solid): 24 vertices, not listed, extent 325.078,167.096 337.573,195.343
no net on ASY_DWG (solid): 82 vertices, not listed, extent 420.719,-128.99 427.065,-125.762
no net on ASY_DWG (solid): 83 vertices, not listed, extent 409.107,-130.346 414.012,-125.758
no net on ASY_DWG (solid): 74 vertices, not listed, extent 395.325,-131.581 402.718,-124.845
no net on ASY_DWG (solid): 89 vertices, not listed, extent 383.655,-128.609 390.075,-124.845
no net on ASY_DWG (solid): 1029 vertices, not listed, extent 343.436,-138.417 484.482,-124.843
no net on ASY_DWG_R (solid): 82 vertices, not listed, extent -229.102,-128.99 -222.756,-125.762
no net on ASY_DWG_R (solid): 83 vertices, not listed, extent -216.049,-130.346 -211.144,-125.758
no net on ASY_DWG_R (solid): 74 vertices, not listed, extent -204.755,-131.581 -197.362,-124.845
no net on ASY_DWG_R (solid): 89 vertices, not listed, extent -192.112,-128.609 -185.692,-124.845
no net on ASY_DWG_R (solid): 1029 vertices, not listed, extent -286.519,-138.417 -145.473,-124.843
no net on TITLEBLOCK (solid): 26 vertices, not listed, extent 67.532,-106.317 70.232,-105.017
no net on TITLEBLOCK (solid): 62.692,-106.917 63.682,-105.117 64.582,-106.917 62.692,-106.917
no net on TITLEBLOCK (solid): 52.207,-105.017 53.33,-106.226 54.409,-105.017 52.207,-105.017
no net on TITLEBLOCK (solid): 57.394,-105.017 59.932,-107.335 59.932,-105.017 57.394,-105.017
no net on TITLEBLOCK (solid): 331 vertices, not listed, extent 35.457,-111.417 94.162,-104.797
no net on Stiffener "NONET_L-01_P-001" (solid): 100.584,22.275 107.734,22.275 107.734,61.775 100.584,61.775
GND on Bottom Layer "NONET_L-01_P-001" (hatched 90Degree grid 0.508 track 0.203, pour order 67): 302.425,168.775 295.55,161.9 -26.725,161.9 -26.725,-85.95 -27.075,-86.3 -26.35,-85.575 304.575,-85.575
GND on Bottom Layer "NONET_L-01_P-001" (solid, pour order 1): 100.584,22.275 107.734,22.275 107.734,61.768 100.584,61.775
GND on Bottom Layer "NONET_L-01_P-001" (solid, pour order 3): 217.536,145.249 217.263,149.739 217.86,149.777 cw(c217.872,149.577) 218.072,149.59 218.121,148.791 219.418,148.87 cw(c219.431,148.671) 219.63,148.683 219.758,146.587 cw(c219.559,146.575) 219.571,146.375 218.273,146.296 218.322,145.497 cw(c218.123,145.485) 218.135,145.285
GND on Bottom Layer "NONET_L-01_P-001" (solid, pour order 5): 202.752,138.108 202.905,138.893 201.628,139.141 cw(c201.667,139.337) 201.47,139.376 201.871,141.437 cw(c202.067,141.399) 202.105,141.595 203.381,141.347 203.534,142.133 cw(c203.73,142.094) 203.768,142.291 204.357,142.176 203.501,137.757 202.91,137.873 cw(c202.948,138.07)
GND on Bottom Layer "NONET_L-01_P-001" (solid, pour order 7): 243.583,122.055 243.827,122.609 cw(c244.01,122.529) 244.09,122.712 244.823,122.391 245.344,123.582 cw(c245.527,123.502) 245.608,123.685 247.531,122.843 cw(c247.451,122.66) 247.634,122.58 247.113,121.389 247.846,121.068 cw(c247.766,120.885) 247.949,120.805 247.709,120.255
GND on Bottom Layer "NONET_L-01_P-001" (solid, pour order 9): 247.78,105.102 cw(c247.86,105.285) 247.677,105.365 248.198,106.556 247.465,106.877 cw(c247.545,107.06) 247.362,107.14 247.603,107.69 251.735,105.886 251.485,105.336 cw(c251.302,105.416) 251.221,105.233 250.488,105.554 249.967,104.363 cw(c249.784,104.443) 249.704,104.26
GND on Bottom Layer "NONET_L-01_P-001" (solid, pour order 11): 286.827,83.895 ccw(c287.016,83.961) 287.082,83.772 287.837,84.036 288.266,82.809 ccw(c288.455,82.875) 288.521,82.687 290.503,83.38 ccw(c290.437,83.569) 290.626,83.635 290.197,84.862 290.952,85.126 ccw(c290.886,85.315) 291.074,85.381 290.876,85.947 286.631,84.469
GND on Bottom Layer "NONET_L-01_P-001" (solid, pour order 13): 245.978,79.837 cw(c246.098,79.998) 245.938,80.117 246.418,80.758 245.378,81.537 cw(c245.498,81.697) 245.338,81.817 246.597,83.498 cw(c246.757,83.378) 246.877,83.538 247.918,82.758 248.397,83.398 cw(c248.557,83.278) 248.677,83.438 249.157,83.078 246.46,79.476
GND on Bottom Layer "NONET_L-01_P-001" (solid, pour order 15): 286.533,31.091 286.673,31.676 cw(c286.868,31.628) 286.915,31.822 287.692,31.632 288.001,32.895 cw(c288.195,32.848) 288.243,33.042 290.283,32.543 cw(c290.235,32.349) 290.429,32.301 290.121,31.039 290.898,30.849 cw(c290.85,30.654) 291.045,30.607 290.902,30.024
GND on Bottom Layer "NONET_L-01_P-001" (solid, pour order 17): 271.195,17.445 268.516,21.06 268.999,21.423 cw(c269.119,21.263) 269.279,21.383 269.759,20.743 270.799,21.523 cw(c270.919,21.363) 271.079,21.483 272.339,19.802 cw(c272.179,19.682) 272.299,19.522 271.259,18.743 271.738,18.102 cw(c271.578,17.982) 271.698,17.822
GND on Bottom Layer "NONET_L-01_P-001" (solid, pour order 19): 286.63,-0.457 286.827,0.111 cw(c287.016,0.045) 287.082,0.234 287.837,-0.031 288.266,1.197 cw(c288.455,1.13) 288.521,1.319 290.503,0.626 cw(c290.437,0.437) 290.626,0.371 290.197,-0.856 290.952,-1.12 cw(c290.886,-1.309) 291.074,-1.375 290.876,-1.941
GND on Bottom Layer "NONET_L-01_P-001" (solid, pour order 21): 247.604,-23.686 247.362,-23.134 cw(c247.545,-23.054) 247.465,-22.871 248.198,-22.55 247.677,-21.359 cw(c247.86,-21.279) 247.78,-21.096 249.704,-20.254 cw(c249.784,-20.437) 249.967,-20.357 250.488,-21.548 251.221,-21.227 cw(c251.301,-21.411) 251.485,-21.33 251.725,-21.88
GND on Bottom Layer "NONET_L-01_P-001" (solid, pour order 23): 243.827,-38.603 ccw(c244.01,-38.523) 244.09,-38.706 244.823,-38.385 245.344,-39.576 ccw(c245.527,-39.496) 245.608,-39.679 247.531,-38.838 ccw(c247.451,-38.654) 247.634,-38.574 247.113,-37.383 247.846,-37.062 ccw(c247.766,-36.879) 247.949,-36.799 247.709,-36.249 243.588,-38.053
GND on Bottom Layer "NONET_L-01_P-001" (solid, pour order 25): 217.258,-65.731 217.86,-65.771 ccw(c217.872,-65.571) 218.072,-65.584 218.121,-64.785 219.418,-64.864 ccw(c219.431,-64.665) 219.63,-64.677 219.758,-62.581 ccw(c219.559,-62.569) 219.571,-62.369 218.273,-62.29 218.322,-61.491 ccw(c218.123,-61.479) 218.135,-61.279 217.536,-61.243
GND on Bottom Layer "NONET_L-01_P-001" (solid, pour order 27): 183.515,-70.503 183.115,-68.442 cw(c183.311,-68.404) 183.273,-68.207 184.549,-67.959 184.396,-67.174 cw(c184.593,-67.136) 184.555,-66.94 185.144,-66.825 186.004,-71.244 185.413,-71.357 cw(c185.375,-71.161) 185.178,-71.199 185.026,-70.414 183.75,-70.661 cw(c183.711,-70.465)
GND on Bottom Layer "NONET_L-01_P-001" (solid, pour order 29): 195.936,65.946 cw(c196.026,66.125) 195.847,66.215 196.205,66.93 195.042,67.512 cw(c195.131,67.691) 194.953,67.78 195.892,69.658 cw(c196.071,69.569) 196.16,69.748 197.323,69.166 197.681,69.882 cw(c197.859,69.793) 197.949,69.971 198.486,69.703 196.475,65.678
GND on Bottom Layer "NONET_L-01_P-001" (solid, pour order 31): 22 vertices, not listed, extent 194.931,14.014 198.596,18.349
GND on Bottom Layer "NONET_L-01_P-001" (solid, pour order 33): 166.395,-4.651 166.529,-3.862 165.248,-3.643 cw(c165.281,-3.446) 165.084,-3.413 165.437,-1.343 cw(c165.634,-1.376) 165.668,-1.179 166.95,-1.398 167.084,-0.609 cw(c167.281,-0.643) 167.315,-0.446 167.906,-0.546 167.152,-4.984 166.558,-4.881 cw(c166.592,-4.684)
GND on Bottom Layer "NONET_L-01_P-001" (solid, pour order 35): 104.813,150.831 103.957,155.247 104.544,155.363 cw(c104.582,155.167) 104.778,155.205 104.931,154.419 106.207,154.667 cw(c106.245,154.471) 106.441,154.509 106.842,152.448 cw(c106.646,152.41) 106.684,152.213 105.408,151.965 105.56,151.18 cw(c105.364,151.142) 105.402,150.946
GND on Bottom Layer "NONET_L-01_P-001" (solid, pour order 37): 71.634,145.497 71.683,146.296 70.386,146.375 cw(c70.398,146.575) 70.198,146.587 70.326,148.683 cw(c70.526,148.671) 70.538,148.87 71.836,148.791 71.885,149.59 cw(c72.084,149.577) 72.096,149.777 72.695,149.74 72.421,145.249 71.822,145.285 cw(c71.834,145.485)
GND on Bottom Layer "NONET_L-01_P-001" (solid, pour order 39): 122.05,84.552 122.809,88.986 123.398,88.887 cw(c123.365,88.69) 123.562,88.657 123.427,87.868 124.709,87.649 cw(c124.675,87.452) 124.872,87.419 124.519,85.348 cw(c124.322,85.382) 124.288,85.185 123.007,85.404 122.872,84.615 cw(c122.675,84.649) 122.642,84.451
GND on Bottom Layer "NONET_L-01_P-001" (solid, pour order 41): 93.483,65.678 91.473,69.701 92.008,69.971 cw(c92.097,69.793) 92.276,69.882 92.634,69.166 93.797,69.748 cw(c93.886,69.569) 94.065,69.658 95.004,67.78 cw(c94.825,67.691) 94.915,67.512 93.752,66.93 94.11,66.215 cw(c93.931,66.125) 94.02,65.946
GND on Bottom Layer "NONET_L-01_P-001" (solid, pour order 43): 92.008,14.034 ccw(c92.097,14.213) 92.276,14.124 92.634,14.839 93.797,14.258 ccw(c93.886,14.437) 94.065,14.348 95.004,16.226 ccw(c94.825,16.315) 94.915,16.494 93.752,17.076 94.11,17.791 ccw(c93.931,17.881) 94.02,18.059 93.483,18.328 91.473,14.302
GND on Bottom Layer "NONET_L-01_P-001" (solid, pour order 45): 85.594,-58.169 86.188,-58.285 ccw(c86.226,-58.089) 86.423,-58.127 86.575,-57.341 87.851,-57.589 ccw(c87.889,-57.393) 88.086,-57.431 88.486,-55.37 ccw(c88.29,-55.332) 88.328,-55.135 87.052,-54.887 87.205,-54.102 ccw(c87.008,-54.064) 87.046,-53.867 86.457,-53.753